# EAGLE board TimeSeed_Panel (EAGLE 9.6.2)
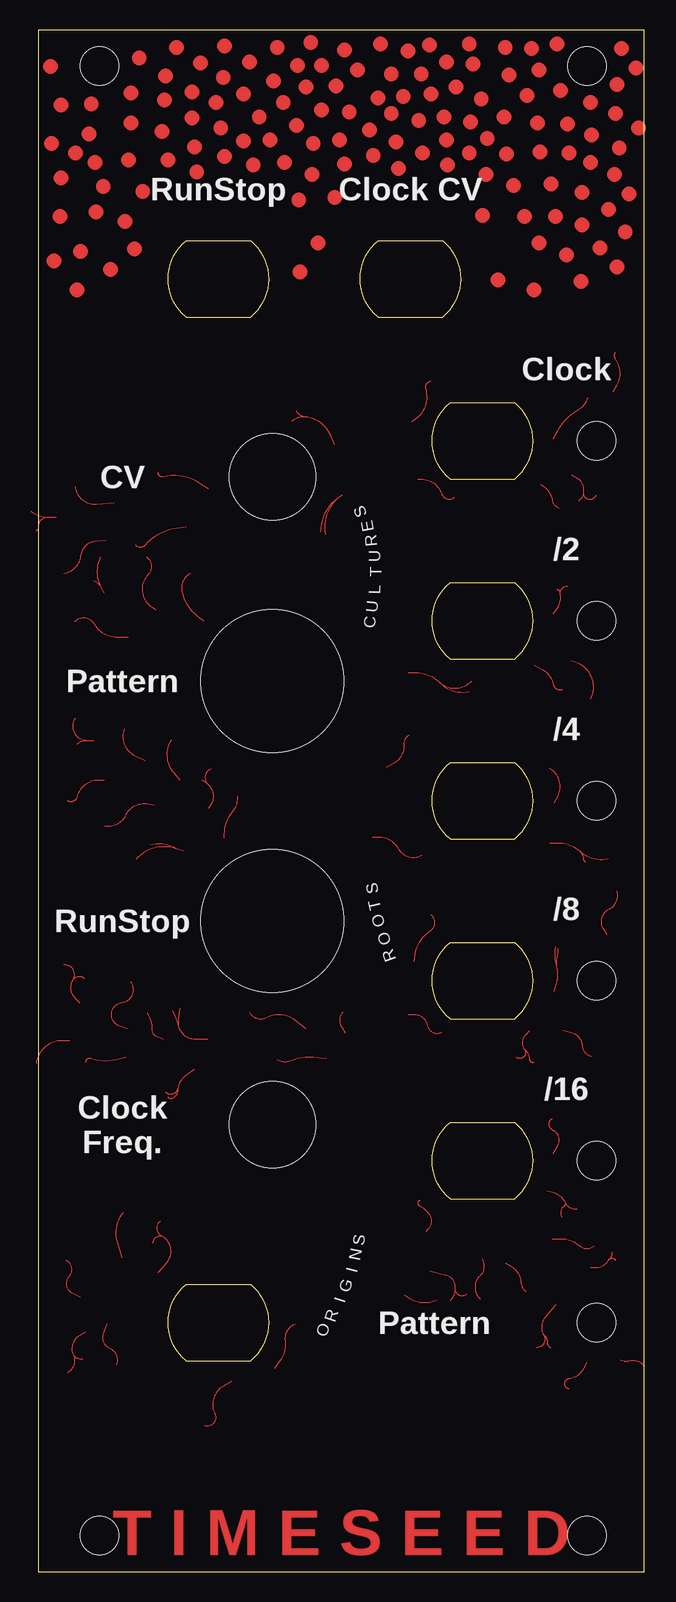
[diagram p0: board, top side]
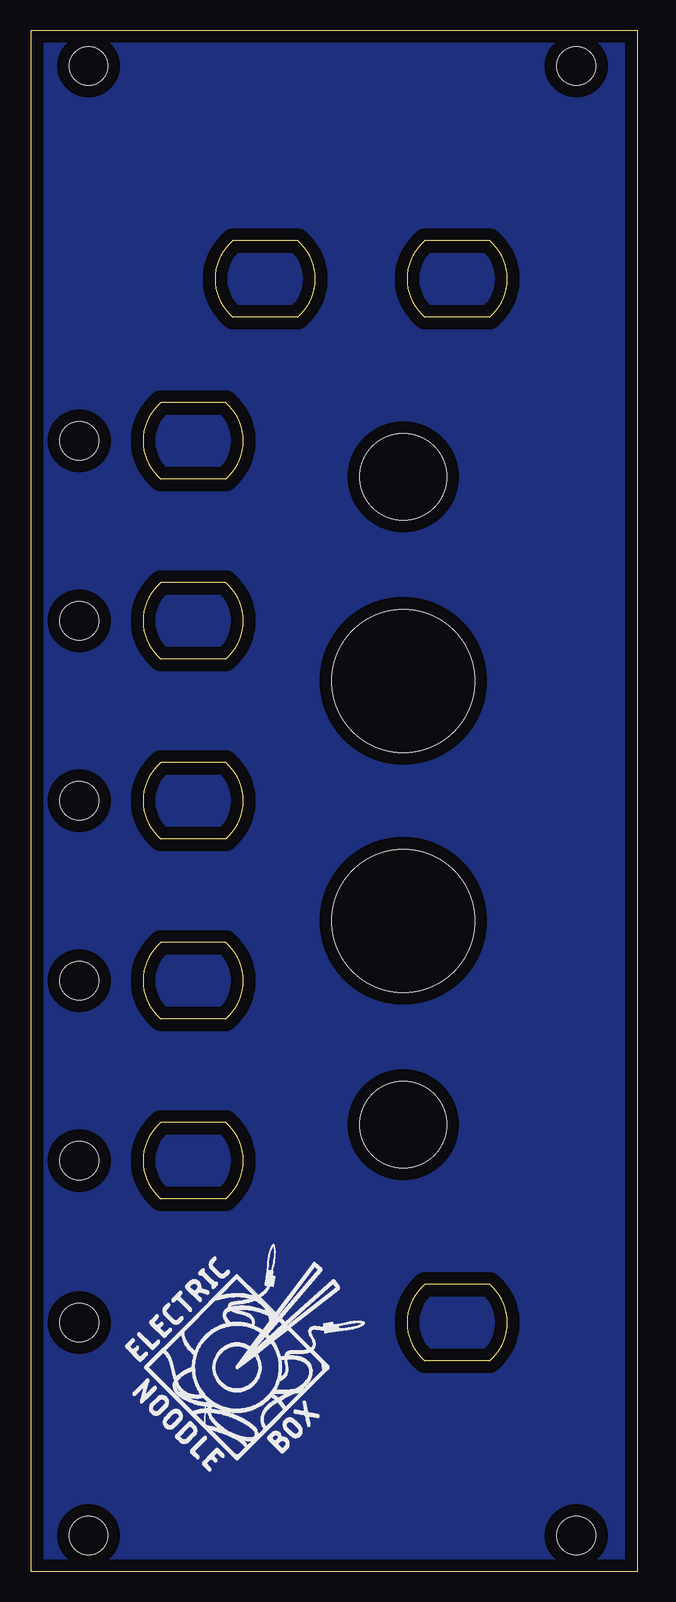
[diagram p1: board, bottom side, seen from below]

Size 50.5 x 128.5 mm. Coordinates in mm from the lower left corner, seen from the top.
Outline: 0,0 50.5,0 50.5,128.5 0,128.5 0,0
Copper layers (1*16): Top 0.035mm / dielectric 1.5mm / Bottom 0.035mm
Design rules "default": minimum track width 6mil, minimum drill 0.35mm, track to track 6mil, track to pad 6mil, pad to pad 6mil, via to via 6mil, smd to smd 6mil, copper to edge 40mil, drill to drill 6mil, minimum pad ring 10mil, minimum via ring 8mil, stop-mask expansion 4mil, vias tented up to drill 0mil, thermal gap 10mil
Holes 3.2 mm at 5.08,3 45.72,3 5.08,125.5 45.72,125.5

## Footprints (pad centres in the part's own frame; a part is rotated, then mirrored left to right if it is on the bottom)
ALPHA9MM_POT_CUTOUT = hole 7.2: 0,0
MCDTS_BUTTON_ROUND_CUTOUT = hole 11.9: 0,0
3MMLED_CUTOUT = hole 3.2: 0,0

## Placement (x,y rotation side)
E$1  [CINCH_BANANA_CUTOUT]  15,107.75 90 top
E$2  [CINCH_BANANA_CUTOUT]  37,94.25 90 top
E$3  [CINCH_BANANA_CUTOUT]  31,107.75 90 top
E$4  [CINCH_BANANA_CUTOUT]  37,79.25 90 top
E$5  [CINCH_BANANA_CUTOUT]  37,64.25 90 top
E$6  [CINCH_BANANA_CUTOUT]  37,49.25 90 top
E$7  [CINCH_BANANA_CUTOUT]  37,34.25 90 top
E$8  [CINCH_BANANA_CUTOUT]  15,20.75 90 top
E$9  [ALPHA9MM_POT_CUTOUT]  19.5,91.25 0 top
E$10  [ALPHA9MM_POT_CUTOUT]  19.5,37.25 0 top
E$11  [MCDTS_BUTTON_ROUND_CUTOUT]  19.5,74.25 0 top
E$12  [MCDTS_BUTTON_ROUND_CUTOUT]  19.5,54.25 0 top
E$13  [3MMLED_CUTOUT]  46.5,79.25 0 top
E$14  [3MMLED_CUTOUT]  46.5,94.25 0 top
E$15  [3MMLED_CUTOUT]  46.5,64.25 0 top
E$16  [3MMLED_CUTOUT]  46.5,49.25 0 top
E$17  [3MMLED_CUTOUT]  46.5,34.25 0 top
E$18  [3MMLED_CUTOUT]  46.5,20.75 0 top
E$19  [LOGO20X20]  42.7,7.85 0 bottom

## Library data of the parts
E$1-E$19 = ElectricNoodleBox

## Tracks (layer width: path | path; a pad name or v marks a point on that pad's centre or on a via)
GND
  pour Bottom: 0,0 50.5,0 50.5,128.5 0,128.5
S$1
  Top 0.1: 15.5,61.45 arc-40 16.2,63.35
S$2
  Top 0.1: 3.5,22.85 2.9,23.15
S$3
  Top 0.1: 2.9,23.15 arc-104 2.6,24.65
S$4
  Top 0.1: 2.6,24.65 arc108 2.3,25.95
S$5
  Top 0.1: 3.9,19.95 3.4,19.65
S$6
  Top 0.1: 3.4,19.65 arc83 2.9,18.05
S$7
  Top 0.1: 2.9,18.05 arc-86 2.4,16.55
S$8
  Top 0.1: 5.7,20.65 5.4,19.85
S$9
  Top 0.1: 5.4,19.85 arc86 5.9,18.65
S$10
  Top 0.1: 5.9,18.65 arc-85 6.5,17.25
S$11
  Top 0.1: 7,26.15 6.6,27.45
S$12
  Top 0.1: 6.6,27.45 arc-57 7.1,29.95
S$13
  Top 0.1: 10,24.95 10.7,25.75
S$14
  Top 0.1: 10.7,25.75 arc103 10.3,27.95
S$15
  Top 0.1: 10.3,27.95 arc-115 10.2,29.25
S$16
  Top 0.1: 16.1,15.85 15.4,15.45
S$17
  Top 0.1: 15.4,15.45 arc87 14.7,13.15
S$18
  Top 0.1: 14.7,13.15 arc-137 13.8,12.15
S$19
  Top 0.1: 19.7,16.95 20.2,17.65
S$20
  Top 0.1: 20.2,17.65 arc43 20.6,19.25
S$21
  Top 0.1: 20.6,19.25 arc-74 21.4,20.65
S$22
  Top 0.1: 30.5,23.05 31,22.75
S$23
  Top 0.1: 31,22.75 arc57 33.2,22.65
S$24
  Top 0.1: 32.6,25.05 33.9,24.75
S$25
  Top 0.1: 33.9,24.75 arc-82 34.7,23.65
S$26
  Top 0.1: 34.7,23.65 arc137 35.7,23.15
S$27
  Top 0.1: 37,26.05 37.1,25.65
S$28
  Top 0.1: 37.1,25.65 arc-61 36.8,24.65
S$29
  Top 0.1: 36.8,24.65 arc95 36.8,22.75
S$30
  Top 0.1: 32.3,28.35 32.5,28.55
S$31
  Top 0.1: 32.5,28.55 arc80 32.6,29.75
S$32
  Top 0.1: 32.6,29.75 arc27 31.8,30.45
S$33
  Top 0.1: 31.8,30.45 arc-124 31.8,30.95
S$34
  Top 0.1: 38.9,25.75 39.4,25.45
S$35
  Top 0.1: 39.4,25.45 arc-55 40.2,24.15
S$36
  Top 0.1: 40.2,24.15 arc45 40.6,23.35
S$37
  Top 0.1: 42.8,27.75 43.5,27.75
S$38
  Top 0.1: 43.5,27.75 arc-41 45.1,27.15
S$39
  Top 0.1: 45.1,27.15 arc82 46.3,27.15
S$40
  Top 0.1: 46,25.35 46.5,25.35
S$41
  Top 0.1: 46.5,25.35 arc62 47.5,25.95
S$42
  Top 0.1: 47.5,25.95 arc-124 48.1,25.95
S$43
  Top 0.1: 43.1,22.25 42.2,21.15
S$44
  Top 0.1: 42.2,21.15 arc70 42.1,19.75
S$45
  Top 0.1: 42.1,19.75 arc-119 41.5,18.65
S$46
  Top 0.1: 45.7,17.45 45.3,16.75
S$47
  Top 0.1: 45.3,16.75 arc-56 44.2,16.05
S$48
  Top 0.1: 44.2,16.05 arc171 44.2,15.25
S$49
  Top 0.1: 48.5,17.65 48.8,17.55
S$50
  Top 0.1: 48.8,17.55 arc37 49.1,17.55
S$51
  Top 0.1: 49.1,17.55 arc-69 50.5,17.15
S$52
  Top 0.1: 42.4,31.75 42.8,31.65
S$53
  Top 0.1: 42.8,31.65 arc-51 43.9,30.75
S$54
  Top 0.1: 43.9,30.75 arc76 44.9,30.25
S$55
  Top 0.1: 42.9,34.85 43.3,35.55
S$56
  Top 0.1: 43.3,35.55 arc96 42.9,36.75
S$57
  Top 0.1: 42.9,36.75 arc-122 42.8,37.75
S$58
  Top 0.1: 30.8,46.45 31.3,46.45
S$59
  Top 0.1: 31.3,46.45 arc-79 32.4,45.55
S$60
  Top 0.1: 32.4,45.55 arc104 33.6,44.95
S$61
  Top 0.1: 40.9,45.05 40.6,44.75
S$62
  Top 0.1: 40.6,44.75 arc80 40.5,43.55
S$63
  Top 0.1: 40.5,43.55 arc-161 39.8,42.85
S$64
  Top 0.1: 43.7,45.15 44.4,44.95
S$65
  Top 0.1: 44.4,44.95 arc-70 45.3,43.85
S$66
  Top 0.1: 45.3,43.85 arc74 46.1,42.95
S$67
  Top 0.1: 43,48.35 43.2,49.05
S$68
  Top 0.1: 43.2,49.05 arc32 43.2,50.45
S$69
  Top 0.1: 43.2,50.45 arc-25 43.1,52.05
S$70
  Top 0.1: 47.4,53.05 47.1,53.55
S$71
  Top 0.1: 47.1,53.55 arc-95 47.6,55.25
S$72
  Top 0.1: 47.6,55.25 arc84 48.2,56.75
S$73
  Top 0.1: 31.3,50.85 31.4,51.45
S$74
  Top 0.1: 31.4,51.45 arc-47 32.7,53.45
S$75
  Top 0.1: 32.7,53.45 arc113 32.7,54.75
S$76
  Top 0.1: 25.6,44.85 25.3,45.35
S$77
  Top 0.1: 25.3,45.35 arc-71 25.4,46.65
S$78
  Top 0.1: 22.3,45.25 21.4,45.95
S$79
  Top 0.1: 21.4,45.95 arc66 19,46.15
S$80
  Top 0.1: 19,46.15 arc-96 17.6,46.65
S$81
  Top 0.1: 24,42.75 22.9,42.85
S$82
  Top 0.1: 22.9,42.85 arc28 21,42.55
S$83
  Top 0.1: 21,42.55 arc-57 19.9,42.65
S$84
  Top 0.1: 14.1,44.35 13.1,44.35
S$85
  Top 0.1: 13.1,44.35 arc-76 11.7,45.45
S$86
  Top 0.1: 11.7,45.45 arc15 11.2,46.75
S$87
  Top 0.1: 13,41.85 12.4,41.45
S$88
  Top 0.1: 12.4,41.45 arc45 11.6,40.25
S$89
  Top 0.1: 11.6,40.25 arc-124 10.6,39.95
S$90
  Top 0.1: 7.3,42.85 6.5,42.65
S$91
  Top 0.1: 6.5,42.65 arc-34 4.4,42.75
S$92
  Top 0.1: 4.4,42.75 arc101 3.9,42.45
S$93
  Top 0.1: 7.4,45.25 6.8,45.45
S$94
  Top 0.1: 6.8,45.45 arc-155 7,47.45
S$95
  Top 0.1: 7,47.45 arc121 7.7,49.15
S$96
  Top 0.1: 10.4,44.35 9.9,44.55
S$97
  Top 0.1: 9.9,44.55 arc-69 9.5,45.15
S$98
  Top 0.1: 9.5,45.15 arc34 9.1,46.55
S$99
  Top 0.1: 3.5,47.35 3.1,47.75
S$100
  Top 0.1: 3.1,47.75 arc-76 2.9,49.35
S$101
  Top 0.1: 2.9,49.35 arc129 2.1,50.55
S$102
  Top 0.1: 2.6,44.25 2,44.25
S$103
  Top 0.1: 2,44.25 arc82 -0.2,42.35
S$104
  Top 0.1: 15.5,61.15 15.5,61.45
S$105
  Top 0.1: 15.5,61.45 arc-40 16.2,63.35
S$106
  Top 0.1: 16.2,63.35 arc47 16.6,64.65
S$107
  Top 0.1: 14.2,63.65 14.4,63.95
S$108
  Top 0.1: 14.4,63.95 arc82 14.2,65.55
S$109
  Top 0.1: 14.2,65.55 arc-112 14.4,66.95
S$110
  Top 0.1: 12.1,60.05 11.5,60.25
S$111
  Top 0.1: 11.5,60.25 arc67 8.1,59.35
S$112
  Top 0.1: 11.8,65.95 11.3,66.55
S$113
  Top 0.1: 11.3,66.55 arc-71 11.1,69.35
S$114
  Top 0.1: 9.7,63.85 9.2,63.95
S$115
  Top 0.1: 9.2,63.95 arc76 7.2,62.95
S$116
  Top 0.1: 7.2,62.95 arc-78 5.5,62.15
S$117
  Top 0.1: 8.9,67.55 8.1,67.95
S$118
  Top 0.1: 8.1,67.95 arc-84 7.2,70.25
S$119
  Top 0.1: 5.5,65.95 5,65.95
S$120
  Top 0.1: 5,65.95 arc76 3.2,64.55
S$121
  Top 0.1: 3.2,64.55 arc-110 2.4,64.25
S$122
  Top 0.1: 4.6,69.25 4.1,69.25
S$123
  Top 0.1: 4.1,69.25 arc-124 3.1,71.15
S$124
  Top 0.1: 27.8,61.25 28.3,61.25
S$125
  Top 0.1: 28.3,61.25 arc-61 30,60.25
S$126
  Top 0.1: 30,60.25 arc94 32,59.75
S$127
  Top 0.1: 29,67.05 29.7,67.45
S$128
  Top 0.1: 29.7,67.45 arc64 30.5,68.95
S$129
  Top 0.1: 30.5,68.95 arc-61 30.9,69.75
S$130
  Top 0.1: 43,64.05 43.3,64.65
S$131
  Top 0.1: 43.3,64.65 arc87 42.6,66.95
S$132
  Top 0.1: 42.6,60.75 43.3,60.75
S$133
  Top 0.1: 43.3,60.75 arc-43 45.1,60.05
S$134
  Top 0.1: 45.1,60.05 arc57 47.5,59.45
S$135
  Top 0.1: 30.8,74.95 31.4,74.95
S$136
  Top 0.1: 31.4,74.95 arc-44 33.4,74.15
S$137
  Top 0.1: 33.4,74.15 arc91 36.1,74.25
S$138
  Top 0.1: 42.9,79.85 43.2,80.25
S$139
  Top 0.1: 43.2,80.25 arc46 43.5,81.45
S$140
  Top 0.1: 43.5,81.45 arc-99 44.1,82.15
S$141
  Top 0.1: 44.4,75.95 44.7,75.85
S$142
  Top 0.1: 44.7,75.85 arc-98 46,72.75
S$143
  Top 0.1: 41.3,75.55 41.9,75.25
S$144
  Top 0.1: 41.9,75.25 arc-52 42.9,73.95
S$145
  Top 0.1: 42.9,73.95 arc103 43.7,73.55
S$146
  Top 0.1: 7.5,77.85 6.6,77.85
S$147
  Top 0.1: 6.6,77.85 arc-60 4.7,78.95
S$148
  Top 0.1: 4.7,78.95 arc107 3,79.15
S$149
  Top 0.1: 5.5,81.55 5.2,82.15
S$150
  Top 0.1: 5.2,82.15 arc-53 5.2,84.55
S$151
  Top 0.1: 9.8,80.15 9.5,80.35
S$152
  Top 0.1: 9.5,80.35 arc-100 9.2,83.15
S$153
  Top 0.1: 9.2,83.15 arc104 9,84.55
S$154
  Top 0.1: 13.8,79.25 13.5,79.45
S$155
  Top 0.1: 13.5,79.45 arc-46 12,81.75
S$156
  Top 0.1: 12,81.75 arc-70 12.7,83.25
S$157
  Top 0.1: 31.6,91.05 31.9,91.05
S$158
  Top 0.1: 31.9,91.05 arc-70 33.6,89.85
S$159
  Top 0.1: 33.6,89.85 arc110 34.7,89.55
S$160
  Top 0.1: 41.8,90.65 42.1,90.45
S$161
  Top 0.1: 42.1,90.45 arc-48 42.8,89.35
S$162
  Top 0.1: 42.8,89.35 arc64 43.4,88.65
S$163
  Top 0.1: 44.4,91.45 44.9,91.15
S$164
  Top 0.1: 44.9,91.15 arc-69 45.4,90.05
S$165
  Top 0.1: 45.4,90.05 arc170 46.5,89.75
S$166
  Top 0.1: 42.9,94.45 43.3,95.15
S$167
  Top 0.1: 43.3,95.15 arc-31 45,96.85
S$168
  Top 0.1: 45,96.85 arc43 45.8,97.85
S$169
  Top 0.1: 47.9,98.35 48.2,98.85
S$170
  Top 0.1: 48.2,98.85 arc67 48.1,101.05
S$171
  Top 0.1: 48.1,101.05 arc-72 48.1,101.65
S$172
  Top 0.1: 31.1,95.85 31.4,96.05
S$173
  Top 0.1: 31.4,96.05 arc73 32.3,98.55
S$174
  Top 0.1: 32.3,98.55 arc-93 32.7,99.25
S$175
  Top 0.1: 24.7,93.95 24.4,94.65
S$176
  Top 0.1: 24.4,94.65 arc62 22.2,96.25
S$177
  Top 0.1: 22.2,96.25 arc-61 21.5,96.75
S$178
  Top 0.1: 25.3,89.75 24.9,89.45
S$179
  Top 0.1: 24.9,89.45 arc53 23.5,86.65
S$180
  Top 0.1: 14.2,90.25 13.4,90.75
S$181
  Top 0.1: 13.4,90.75 arc45 10.4,91.25
S$182
  Top 0.1: 10.4,91.25 arc-116 10,91.65
S$183
  Top 0.1: 12.3,87.05 11.5,86.95
S$184
  Top 0.1: 11.5,86.95 arc42 8.9,85.55
S$185
  Top 0.1: 8.9,85.55 arc-99 8.1,85.55
S$186
  Top 0.1: 6.3,89.05 4.8,88.95
S$187
  Top 0.1: 4.8,88.95 arc-90 3.1,90.45
S$188
  Top 0.1: 5.6,85.95 4.7,85.85
S$189
  Top 0.1: 4.7,85.85 arc77 3.5,84.65
S$190
  Top 0.1: 3.5,84.65 arc-73 2.1,83.15
S$191
  Top 0.1: 1.5,87.85 0.8,87.85
S$192
  Top 0.1: 0.8,87.85 arc-39 -0.6,88.35
S$193
  Top 0.1: 2.9,18.05 3,17.95
S$194
  Top 0.1: 3,17.95 arc58 3.7,17.75
S$195
  Top 0.1: 10.3,27.95 10.2,27.95
S$196
  Top 0.1: 10.2,27.95 arc81 9.5,27.35
S$197
  Top 0.1: 34.7,23.65 34.7,23.55
S$198
  Top 0.1: 34.7,23.55 arc-44 34.3,22.55
S$199
  Top 0.1: 42.1,19.75 42.2,19.65
S$200
  Top 0.1: 42.2,19.65 arc-46 42.4,19.15
S$201
  Top 0.1: 42.4,19.15 arc65 42.7,18.65
S$202
  Top 0.1: 47.5,25.95 47.6,26.05
S$203
  Top 0.1: 47.6,26.05 arc53 47.8,26.65
S$204
  Top 0.1: 43.9,30.75 43.9,30.65
S$205
  Top 0.1: 43.9,30.65 arc-53 43.8,30.45
S$206
  Top 0.1: 43.8,30.45 arc81 43.6,29.55
S$207
  Top 0.1: 40.5,43.55 40.6,43.45
S$208
  Top 0.1: 40.6,43.45 arc-44 40.9,42.75
S$209
  Top 0.1: 40.9,42.75 arc103 41.3,42.45
S$210
  Top 0.1: 43.2,50.45 43.2,50.55
S$211
  Top 0.1: 43.2,50.55 arc-11 43.3,51.55
S$212
  Top 0.1: 43.3,51.55 arc23 43.3,51.95
S$213
  Top 0.1: 45.1,60.05 45.2,59.95
S$214
  Top 0.1: 45.2,59.95 arc-46 45.4,59.45
S$215
  Top 0.1: 45.4,59.45 arc70 45.6,59.15
S$216
  Top 0.1: 33.4,74.15 33.5,74.05
S$217
  Top 0.1: 33.5,74.05 arc57 35.9,73.35
S$218
  Top 0.1: 43.5,81.45 43.5,81.55
S$219
  Top 0.1: 43.5,81.55 arc90 43.2,81.85
S$220
  Top 0.1: 45.4,90.05 45.4,89.95
S$221
  Top 0.1: 45.4,89.95 arc-59 45,89.25
S$222
  Top 0.1: 11.6,40.25 11.6,40.15
S$223
  Top 0.1: 11.6,40.15 arc-59 11.2,39.45
S$224
  Top 0.1: 11.2,39.45 arc-89 10.8,39.55
S$225
  Top 0.1: 2.9,49.35 3,49.45
S$226
  Top 0.1: 3,49.45 arc-90 3.8,49.45
S$227
  Top 0.1: 11.7,45.45 11.7,45.55
S$228
  Top 0.1: 11.7,45.55 arc-8 11.8,46.95
S$229
  Top 0.1: 11.5,60.25 11.3,60.35
S$230
  Top 0.1: 11.3,60.35 arc42 9.3,60.55
S$231
  Top 0.1: 4.1,69.25 4,69.25
S$232
  Top 0.1: 4,69.25 arc41 3.2,68.95
S$233
  Top 0.1: 14.2,65.55 14.1,65.65
S$234
  Top 0.1: 14.1,65.65 arc28 13.6,65.95
S$235
  Top 0.1: 5.2,82.15 5.1,82.25
S$236
  Top 0.1: 5.1,82.25 arc28 4.6,82.55
S$237
  Top 0.1: 24.9,89.45 24.8,89.35
S$238
  Top 0.1: 24.8,89.35 arc56 23.9,86.45
S$239
  Top 0.1: 0.8,87.85 0.7,87.85
S$240
  Top 0.1: 0.7,87.85 arc98 0,87.05
S$241
  Top 0.1: 0,87.05 arc-83 -0.2,86.75
S$242
  Top 0.1: 22.2,96.25 22.1,96.25
S$243
  Top 0.1: 22.1,96.25 arc44 21.1,95.85
S$244
  Top 0.1: 3.5,22.85 2.9,23.15
S$245
  Top 0.1: 2.9,23.15 arc-104 2.6,24.65
S$246
  Top 0.1: 2.6,24.65 arc108 2.3,25.95
S$247
  Top 0.1: 3.9,19.95 3.4,19.65
S$248
  Top 0.1: 3.4,19.65 arc83 2.9,18.05
S$249
  Top 0.1: 2.9,18.05 arc-86 2.4,16.55
S$250
  Top 0.1: 5.7,20.65 5.4,19.85
S$251
  Top 0.1: 5.4,19.85 arc86 5.9,18.65
S$252
  Top 0.1: 5.9,18.65 arc-85 6.5,17.25
S$253
  Top 0.1: 7,26.15 6.6,27.45
S$254
  Top 0.1: 6.6,27.45 arc-57 7.1,29.95
S$255
  Top 0.1: 10,24.95 10.7,25.75
S$256
  Top 0.1: 10.7,25.75 arc103 10.3,27.95
S$257
  Top 0.1: 10.3,27.95 arc-115 10.2,29.25
S$258
  Top 0.1: 16.1,15.85 15.4,15.45
S$259
  Top 0.1: 15.4,15.45 arc87 14.7,13.15
S$260
  Top 0.1: 14.7,13.15 arc-137 13.8,12.15
S$261
  Top 0.1: 19.7,16.95 20.2,17.65
S$262
  Top 0.1: 20.2,17.65 arc43 20.6,19.25
S$263
  Top 0.1: 20.6,19.25 arc-74 21.4,20.65
S$264
  Top 0.1: 30.5,23.05 31,22.75
S$265
  Top 0.1: 31,22.75 arc57 33.2,22.65
S$266
  Top 0.1: 32.6,25.05 33.9,24.75
S$267
  Top 0.1: 33.9,24.75 arc-82 34.7,23.65
S$268
  Top 0.1: 34.7,23.65 arc137 35.7,23.15
S$269
  Top 0.1: 37,26.05 37.1,25.65
S$270
  Top 0.1: 37.1,25.65 arc-61 36.8,24.65
S$271
  Top 0.1: 36.8,24.65 arc95 36.8,22.75
S$272
  Top 0.1: 32.3,28.35 32.5,28.55
S$273
  Top 0.1: 32.5,28.55 arc80 32.6,29.75
S$274
  Top 0.1: 32.6,29.75 arc27 31.8,30.45
S$275
  Top 0.1: 31.8,30.45 arc-124 31.8,30.95
S$276
  Top 0.1: 38.9,25.75 39.4,25.45
S$277
  Top 0.1: 39.4,25.45 arc-55 40.2,24.15
S$278
  Top 0.1: 40.2,24.15 arc45 40.6,23.35
S$279
  Top 0.1: 42.8,27.75 43.5,27.75
S$280
  Top 0.1: 43.5,27.75 arc-41 45.1,27.15
S$281
  Top 0.1: 45.1,27.15 arc82 46.3,27.15
S$282
  Top 0.1: 46,25.35 46.5,25.35
S$283
  Top 0.1: 46.5,25.35 arc62 47.5,25.95
S$284
  Top 0.1: 47.5,25.95 arc-124 48.1,25.95
S$285
  Top 0.1: 43.1,22.25 42.2,21.15
S$286
  Top 0.1: 42.2,21.15 arc70 42.1,19.75
S$287
  Top 0.1: 42.1,19.75 arc-119 41.5,18.65
S$288
  Top 0.1: 45.7,17.45 45.3,16.75
S$289
  Top 0.1: 45.3,16.75 arc-56 44.2,16.05
S$290
  Top 0.1: 44.2,16.05 arc171 44.2,15.25
S$291
  Top 0.1: 48.5,17.65 48.8,17.55
S$292
  Top 0.1: 48.8,17.55 arc37 49.1,17.55
S$293
  Top 0.1: 49.1,17.55 arc-69 50.5,17.15
S$294
  Top 0.1: 42.4,31.75 42.8,31.65
S$295
  Top 0.1: 42.8,31.65 arc-51 43.9,30.75
S$296
  Top 0.1: 43.9,30.75 arc76 44.9,30.25
S$297
  Top 0.1: 42.9,34.85 43.3,35.55
S$298
  Top 0.1: 43.3,35.55 arc96 42.9,36.75
S$299
  Top 0.1: 42.9,36.75 arc-122 42.8,37.75
S$300
  Top 0.1: 30.8,46.45 31.3,46.45
S$301
  Top 0.1: 31.3,46.45 arc-79 32.4,45.55
S$302
  Top 0.1: 32.4,45.55 arc104 33.6,44.95
S$303
  Top 0.1: 40.9,45.05 40.6,44.75
S$304
  Top 0.1: 40.6,44.75 arc80 40.5,43.55
S$305
  Top 0.1: 40.5,43.55 arc-161 39.8,42.85
S$306
  Top 0.1: 43.7,45.15 44.4,44.95
S$307
  Top 0.1: 44.4,44.95 arc-70 45.3,43.85
S$308
  Top 0.1: 45.3,43.85 arc74 46.1,42.95
S$309
  Top 0.1: 43,48.35 43.2,49.05
S$310
  Top 0.1: 43.2,49.05 arc32 43.2,50.45
S$311
  Top 0.1: 43.2,50.45 arc-25 43.1,52.05
S$312
  Top 0.1: 47.4,53.05 47.1,53.55
S$313
  Top 0.1: 47.1,53.55 arc-95 47.6,55.25
S$314
  Top 0.1: 47.6,55.25 arc84 48.2,56.75
S$315
  Top 0.1: 31.3,50.85 31.4,51.45
S$316
  Top 0.1: 31.4,51.45 arc-47 32.7,53.45
S$317
  Top 0.1: 32.7,53.45 arc113 32.7,54.75
S$318
  Top 0.1: 25.6,44.85 25.3,45.35
S$319
  Top 0.1: 25.3,45.35 arc-71 25.4,46.65
S$320
  Top 0.1: 22.3,45.25 21.4,45.95
S$321
  Top 0.1: 21.4,45.95 arc66 19,46.15
S$322
  Top 0.1: 19,46.15 arc-96 17.6,46.65
S$323
  Top 0.1: 24,42.75 22.9,42.85
S$324
  Top 0.1: 22.9,42.85 arc28 21,42.55
S$325
  Top 0.1: 21,42.55 arc-57 19.9,42.65
S$326
  Top 0.1: 14.1,44.35 13.1,44.35
S$327
  Top 0.1: 13.1,44.35 arc-76 11.7,45.45
S$328
  Top 0.1: 11.7,45.45 arc15 11.2,46.75
S$329
  Top 0.1: 13,41.85 12.4,41.45
S$330
  Top 0.1: 12.4,41.45 arc45 11.6,40.25
S$331
  Top 0.1: 11.6,40.25 arc-124 10.6,39.95
S$332
  Top 0.1: 7.3,42.85 6.5,42.65
S$333
  Top 0.1: 6.5,42.65 arc-34 4.4,42.75
S$334
  Top 0.1: 4.4,42.75 arc101 3.9,42.45
S$335
  Top 0.1: 7.4,45.25 6.8,45.45
S$336
  Top 0.1: 6.8,45.45 arc-155 7,47.45
S$337
  Top 0.1: 7,47.45 arc121 7.7,49.15
S$338
  Top 0.1: 10.4,44.35 9.9,44.55
S$339
  Top 0.1: 9.9,44.55 arc-69 9.5,45.15
S$340
  Top 0.1: 9.5,45.15 arc34 9.1,46.55
S$341
  Top 0.1: 3.5,47.35 3.1,47.75
S$342
  Top 0.1: 3.1,47.75 arc-76 2.9,49.35
S$343
  Top 0.1: 2.9,49.35 arc129 2.1,50.55
S$344
  Top 0.1: 2.6,44.25 2,44.25
S$345
  Top 0.1: 2,44.25 arc82 -0.2,42.35
S$346
  Top 0.1: 15.5,61.15 15.5,61.45
S$347
  Top 0.1: 15.5,61.45 arc-40 16.2,63.35
S$348
  Top 0.1: 16.2,63.35 arc47 16.6,64.65
S$349
  Top 0.1: 14.2,63.65 14.4,63.95
S$350
  Top 0.1: 14.4,63.95 arc82 14.2,65.55
S$351
  Top 0.1: 14.2,65.55 arc-112 14.4,66.95
S$352
  Top 0.1: 12.1,60.05 11.5,60.25
S$353
  Top 0.1: 11.5,60.25 arc67 8.1,59.35
S$354
  Top 0.1: 11.8,65.95 11.3,66.55
S$355
  Top 0.1: 11.3,66.55 arc-71 11.1,69.35
S$356
  Top 0.1: 9.7,63.85 9.2,63.95
S$357
  Top 0.1: 9.2,63.95 arc76 7.2,62.95
S$358
  Top 0.1: 7.2,62.95 arc-78 5.5,62.15
S$359
  Top 0.1: 8.9,67.55 8.1,67.95
S$360
  Top 0.1: 8.1,67.95 arc-84 7.2,70.25
S$361
  Top 0.1: 5.5,65.95 5,65.95
S$362
  Top 0.1: 5,65.95 arc76 3.2,64.55
S$363
  Top 0.1: 3.2,64.55 arc-110 2.4,64.25
S$364
  Top 0.1: 4.6,69.25 4.1,69.25
S$365
  Top 0.1: 4.1,69.25 arc-124 3.1,71.15
S$366
  Top 0.1: 27.8,61.25 28.3,61.25
S$367
  Top 0.1: 28.3,61.25 arc-61 30,60.25
S$368
  Top 0.1: 30,60.25 arc94 32,59.75
S$369
  Top 0.1: 29,67.05 29.7,67.45
S$370
  Top 0.1: 29.7,67.45 arc64 30.5,68.95
S$371
  Top 0.1: 30.5,68.95 arc-61 30.9,69.75
S$372
  Top 0.1: 43,64.05 43.3,64.65
S$373
  Top 0.1: 43.3,64.65 arc87 42.6,66.95
S$374
  Top 0.1: 42.6,60.75 43.3,60.75
S$375
  Top 0.1: 43.3,60.75 arc-43 45.1,60.05
S$376
  Top 0.1: 45.1,60.05 arc57 47.5,59.45
S$377
  Top 0.1: 30.8,74.95 31.4,74.95
S$378
  Top 0.1: 31.4,74.95 arc-44 33.4,74.15
S$379
  Top 0.1: 33.4,74.15 arc91 36.1,74.25
S$380
  Top 0.1: 42.9,79.85 43.2,80.25
S$381
  Top 0.1: 43.2,80.25 arc46 43.5,81.45
S$382
  Top 0.1: 43.5,81.45 arc-99 44.1,82.15
S$383
  Top 0.1: 44.4,75.95 44.7,75.85
S$384
  Top 0.1: 44.7,75.85 arc-98 46,72.75
S$385
  Top 0.1: 41.3,75.55 41.9,75.25
S$386
  Top 0.1: 41.9,75.25 arc-52 42.9,73.95
S$387
  Top 0.1: 42.9,73.95 arc103 43.7,73.55
S$388
  Top 0.1: 7.5,77.85 6.6,77.85
S$389
  Top 0.1: 6.6,77.85 arc-60 4.7,78.95
S$390
  Top 0.1: 4.7,78.95 arc107 3,79.15
S$391
  Top 0.1: 5.5,81.55 5.2,82.15
S$392
  Top 0.1: 5.2,82.15 arc-53 5.2,84.55
S$393
  Top 0.1: 9.8,80.15 9.5,80.35
S$394
  Top 0.1: 9.5,80.35 arc-100 9.2,83.15
S$395
  Top 0.1: 9.2,83.15 arc104 9,84.55
S$396
  Top 0.1: 13.8,79.25 13.5,79.45
S$397
  Top 0.1: 13.5,79.45 arc-46 12,81.75
S$398
  Top 0.1: 12,81.75 arc-70 12.7,83.25
S$399
  Top 0.1: 31.6,91.05 31.9,91.05
S$400
  Top 0.1: 31.9,91.05 arc-70 33.6,89.85
S$401
  Top 0.1: 33.6,89.85 arc110 34.7,89.55
S$402
  Top 0.1: 41.8,90.65 42.1,90.45
S$403
  Top 0.1: 42.1,90.45 arc-48 42.8,89.35
S$404
  Top 0.1: 42.8,89.35 arc64 43.4,88.65
S$405
  Top 0.1: 44.4,91.45 44.9,91.15
S$406
  Top 0.1: 44.9,91.15 arc-69 45.4,90.05
S$407
  Top 0.1: 45.4,90.05 arc170 46.5,89.75
S$408
  Top 0.1: 42.9,94.45 43.3,95.15
S$409
  Top 0.1: 43.3,95.15 arc-31 45,96.85
S$410
  Top 0.1: 45,96.85 arc43 45.8,97.85
S$411
  Top 0.1: 47.9,98.35 48.2,98.85
S$412
  Top 0.1: 48.2,98.85 arc67 48.1,101.05
S$413
  Top 0.1: 48.1,101.05 arc-72 48.1,101.65
S$414
  Top 0.1: 31.1,95.85 31.4,96.05
S$415
  Top 0.1: 31.4,96.05 arc73 32.3,98.55
S$416
  Top 0.1: 32.3,98.55 arc-93 32.7,99.25
S$417
  Top 0.1: 24.7,93.95 24.4,94.65
S$418
  Top 0.1: 24.4,94.65 arc62 22.2,96.25
S$419
  Top 0.1: 22.2,96.25 arc-61 21.5,96.75
S$420
  Top 0.1: 25.3,89.75 24.9,89.45
S$421
  Top 0.1: 24.9,89.45 arc53 23.5,86.65
S$422
  Top 0.1: 14.2,90.25 13.4,90.75
S$423
  Top 0.1: 13.4,90.75 arc45 10.4,91.25
S$424
  Top 0.1: 10.4,91.25 arc-116 10,91.65
S$425
  Top 0.1: 12.3,87.05 11.5,86.95
S$426
  Top 0.1: 11.5,86.95 arc42 8.9,85.55
S$427
  Top 0.1: 8.9,85.55 arc-99 8.1,85.55
S$428
  Top 0.1: 6.3,89.05 4.8,88.95
S$429
  Top 0.1: 4.8,88.95 arc-90 3.1,90.45
S$430
  Top 0.1: 5.6,85.95 4.7,85.85
S$431
  Top 0.1: 4.7,85.85 arc77 3.5,84.65
S$432
  Top 0.1: 3.5,84.65 arc-73 2.1,83.15
S$433
  Top 0.1: 1.5,87.85 0.8,87.85
S$434
  Top 0.1: 0.8,87.85 arc-39 -0.6,88.35
S$435
  Top 0.1: 2.9,18.05 3,17.95
S$436
  Top 0.1: 3,17.95 arc58 3.7,17.75
S$437
  Top 0.1: 10.3,27.95 10.2,27.95
S$438
  Top 0.1: 10.2,27.95 arc81 9.5,27.35
S$439
  Top 0.1: 34.7,23.65 34.7,23.55
S$440
  Top 0.1: 34.7,23.55 arc-44 34.3,22.55
S$441
  Top 0.1: 42.1,19.75 42.2,19.65
S$442
  Top 0.1: 42.2,19.65 arc-46 42.4,19.15
S$443
  Top 0.1: 42.4,19.15 arc65 42.7,18.65
S$444
  Top 0.1: 47.5,25.95 47.6,26.05
S$445
  Top 0.1: 47.6,26.05 arc53 47.8,26.65
S$446
  Top 0.1: 43.9,30.75 43.9,30.65
S$447
  Top 0.1: 43.9,30.65 arc-53 43.8,30.45
S$448
  Top 0.1: 43.8,30.45 arc81 43.6,29.55
S$449
  Top 0.1: 40.5,43.55 40.6,43.45
S$450
  Top 0.1: 40.6,43.45 arc-44 40.9,42.75
S$451
  Top 0.1: 40.9,42.75 arc103 41.3,42.45
S$452
  Top 0.1: 43.2,50.45 43.2,50.55
S$453
  Top 0.1: 43.2,50.55 arc-11 43.3,51.55
S$454
  Top 0.1: 43.3,51.55 arc23 43.3,51.95
S$455
  Top 0.1: 45.1,60.05 45.2,59.95
S$456
  Top 0.1: 45.2,59.95 arc-46 45.4,59.45
S$457
  Top 0.1: 45.4,59.45 arc70 45.6,59.15
S$458
  Top 0.1: 33.4,74.15 33.5,74.05
S$459
  Top 0.1: 33.5,74.05 arc57 35.9,73.35
S$460
  Top 0.1: 43.5,81.45 43.5,81.55
S$461
  Top 0.1: 43.5,81.55 arc90 43.2,81.85
S$462
  Top 0.1: 45.4,90.05 45.4,89.95
S$463
  Top 0.1: 45.4,89.95 arc-59 45,89.25
S$464
  Top 0.1: 11.6,40.25 11.6,40.15
S$465
  Top 0.1: 11.6,40.15 arc-59 11.2,39.45
S$466
  Top 0.1: 11.2,39.45 arc-89 10.8,39.55
S$467
  Top 0.1: 2.9,49.35 3,49.45
S$468
  Top 0.1: 3,49.45 arc-90 3.8,49.45
S$469
  Top 0.1: 11.7,45.45 11.7,45.55
S$470
  Top 0.1: 11.7,45.55 arc-8 11.8,46.95
S$471
  Top 0.1: 11.5,60.25 11.3,60.35
S$472
  Top 0.1: 11.3,60.35 arc42 9.3,60.55
S$473
  Top 0.1: 4.1,69.25 4,69.25
S$474
  Top 0.1: 4,69.25 arc41 3.2,68.95
S$475
  Top 0.1: 14.2,65.55 14.1,65.65
S$476
  Top 0.1: 14.1,65.65 arc28 13.6,65.95
S$477
  Top 0.1: 5.2,82.15 5.1,82.25
S$478
  Top 0.1: 5.1,82.25 arc28 4.6,82.55
S$479
  Top 0.1: 24.9,89.45 24.8,89.35
S$480
  Top 0.1: 24.8,89.35 arc56 23.9,86.45
S$481
  Top 0.1: 0.8,87.85 0.7,87.85
S$482
  Top 0.1: 0.7,87.85 arc98 0,87.05
S$483
  Top 0.1: 0,87.05 arc-83 -0.2,86.75
S$484
  Top 0.1: 22.2,96.25 22.1,96.25
S$485
  Top 0.1: 22.1,96.25 arc44 21.1,95.85
(copper drawn outside any net)
  shapes: Top circle x132

## Text on the board
Top: T I M E S E E D
tPlace: RunStop | Clock CV | Clock | CV | S | E | R | /2 | U | T | L | U | C | Pattern | /4 | S | T | /8 | RunStop | O | O | R | /16 | Clock / Freq. | S | N | I | G | I | R | O | Pattern
tStop: T I M E S E E D
Reference: Clock / Freq.